# EAGLE board MG2639_Cellular_Shield_Panel-v11 (EAGLE 6.6.0), part 1 of 2
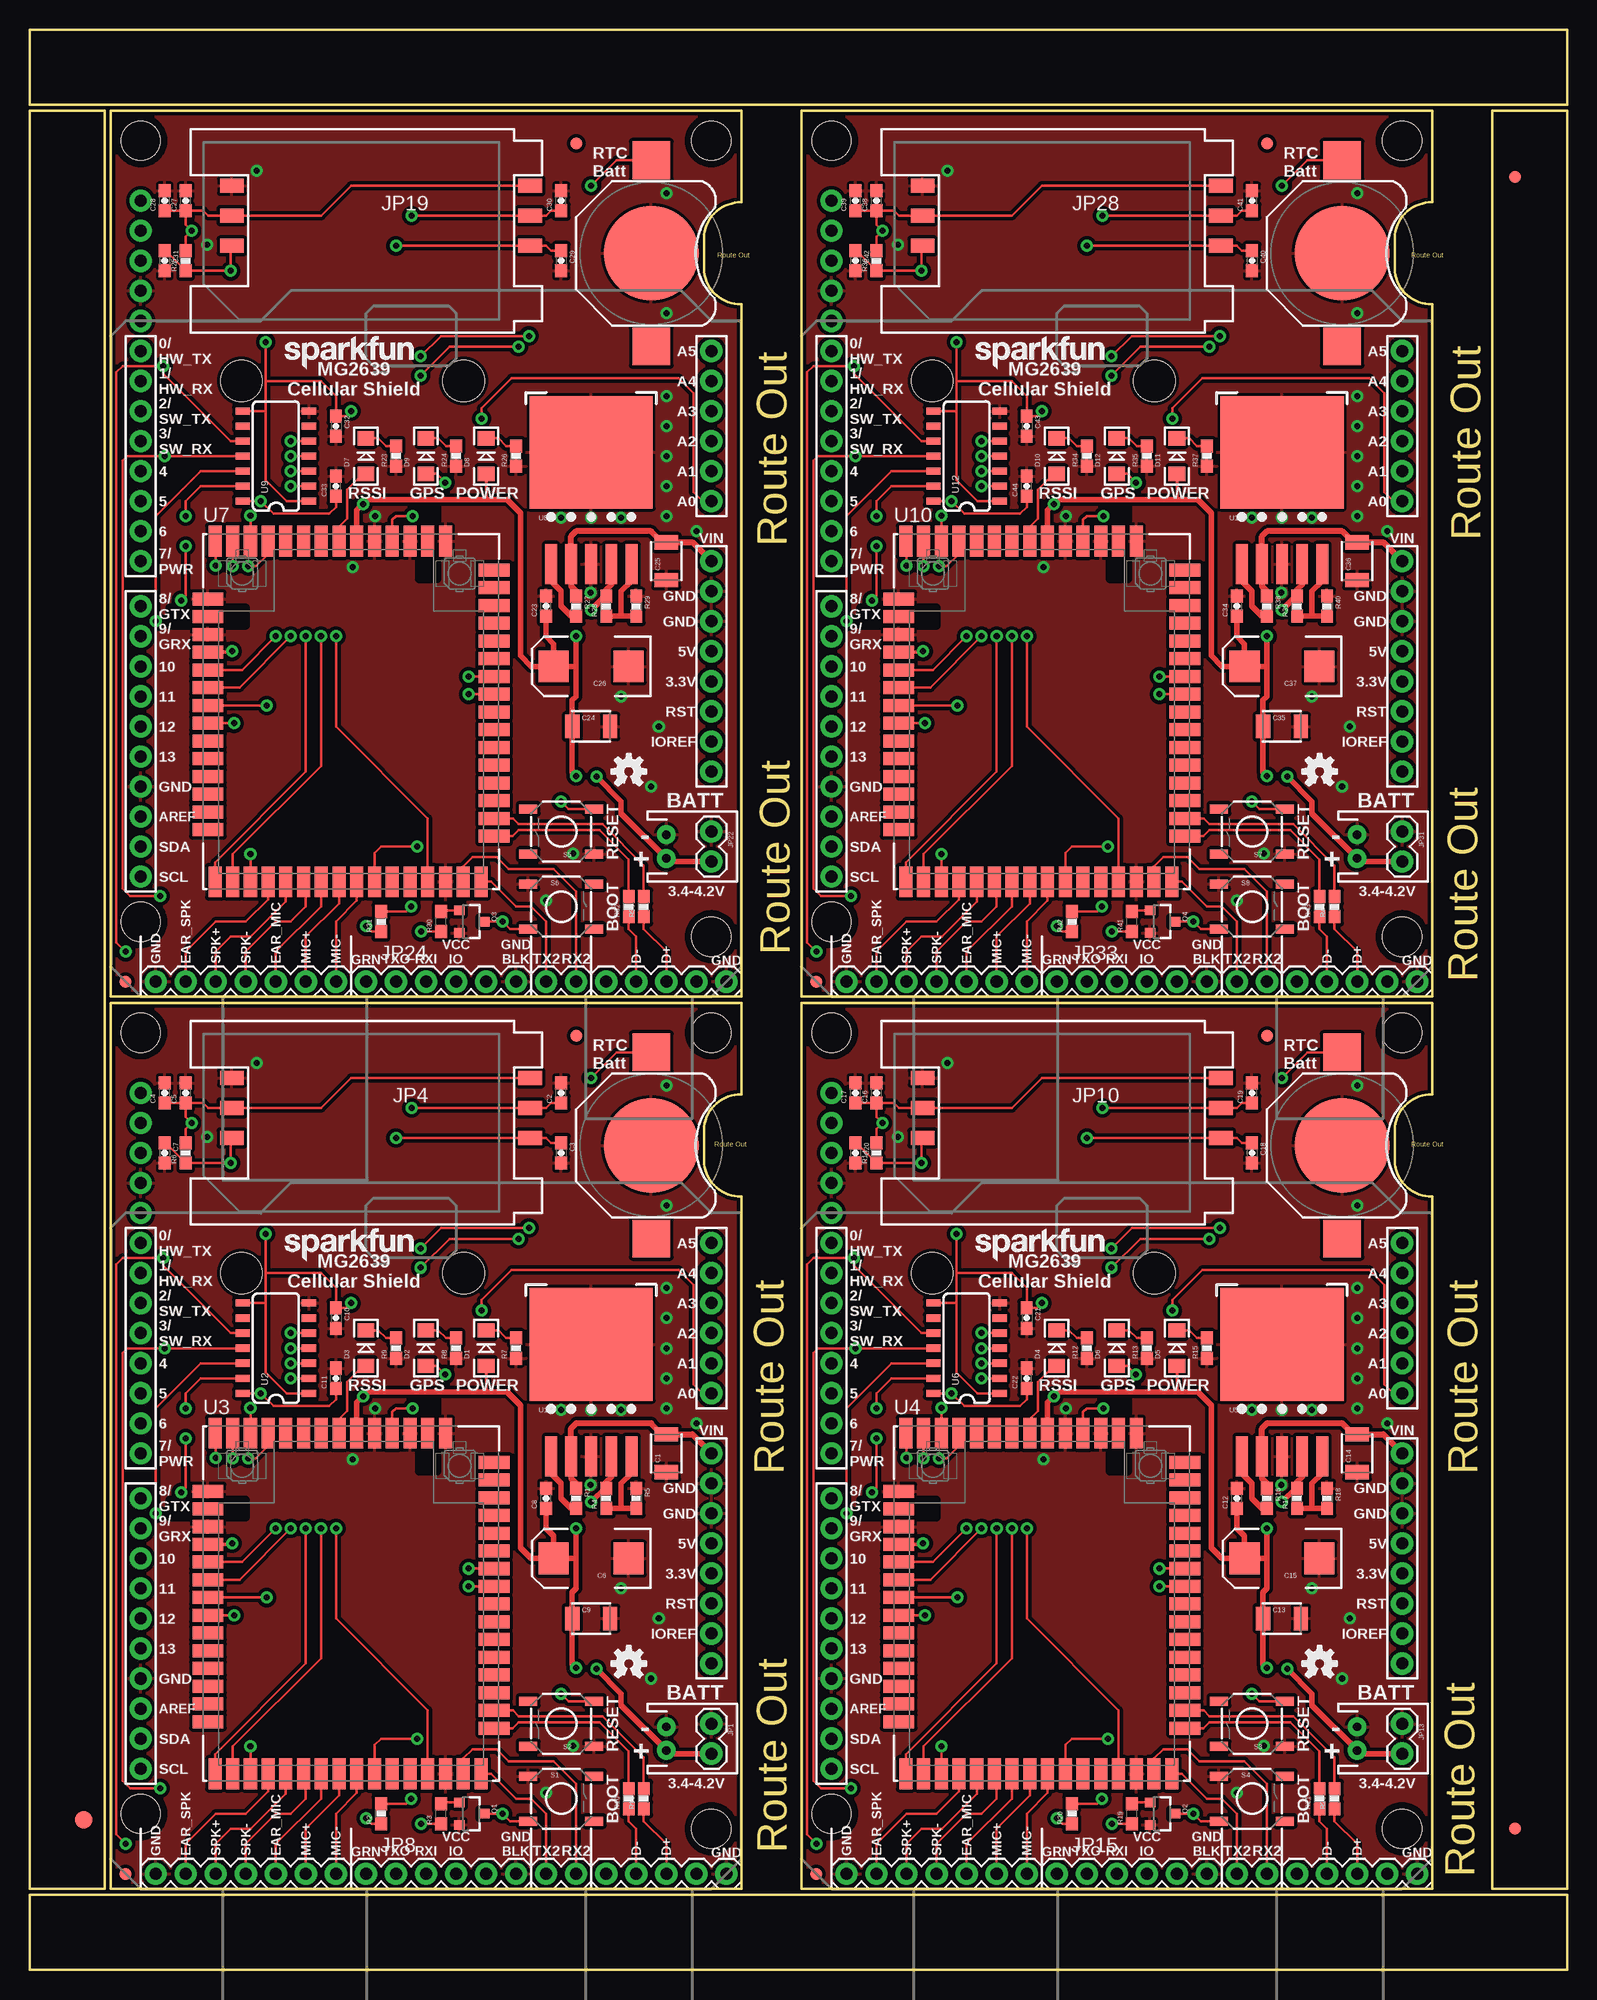
[diagram p0: board, top side]
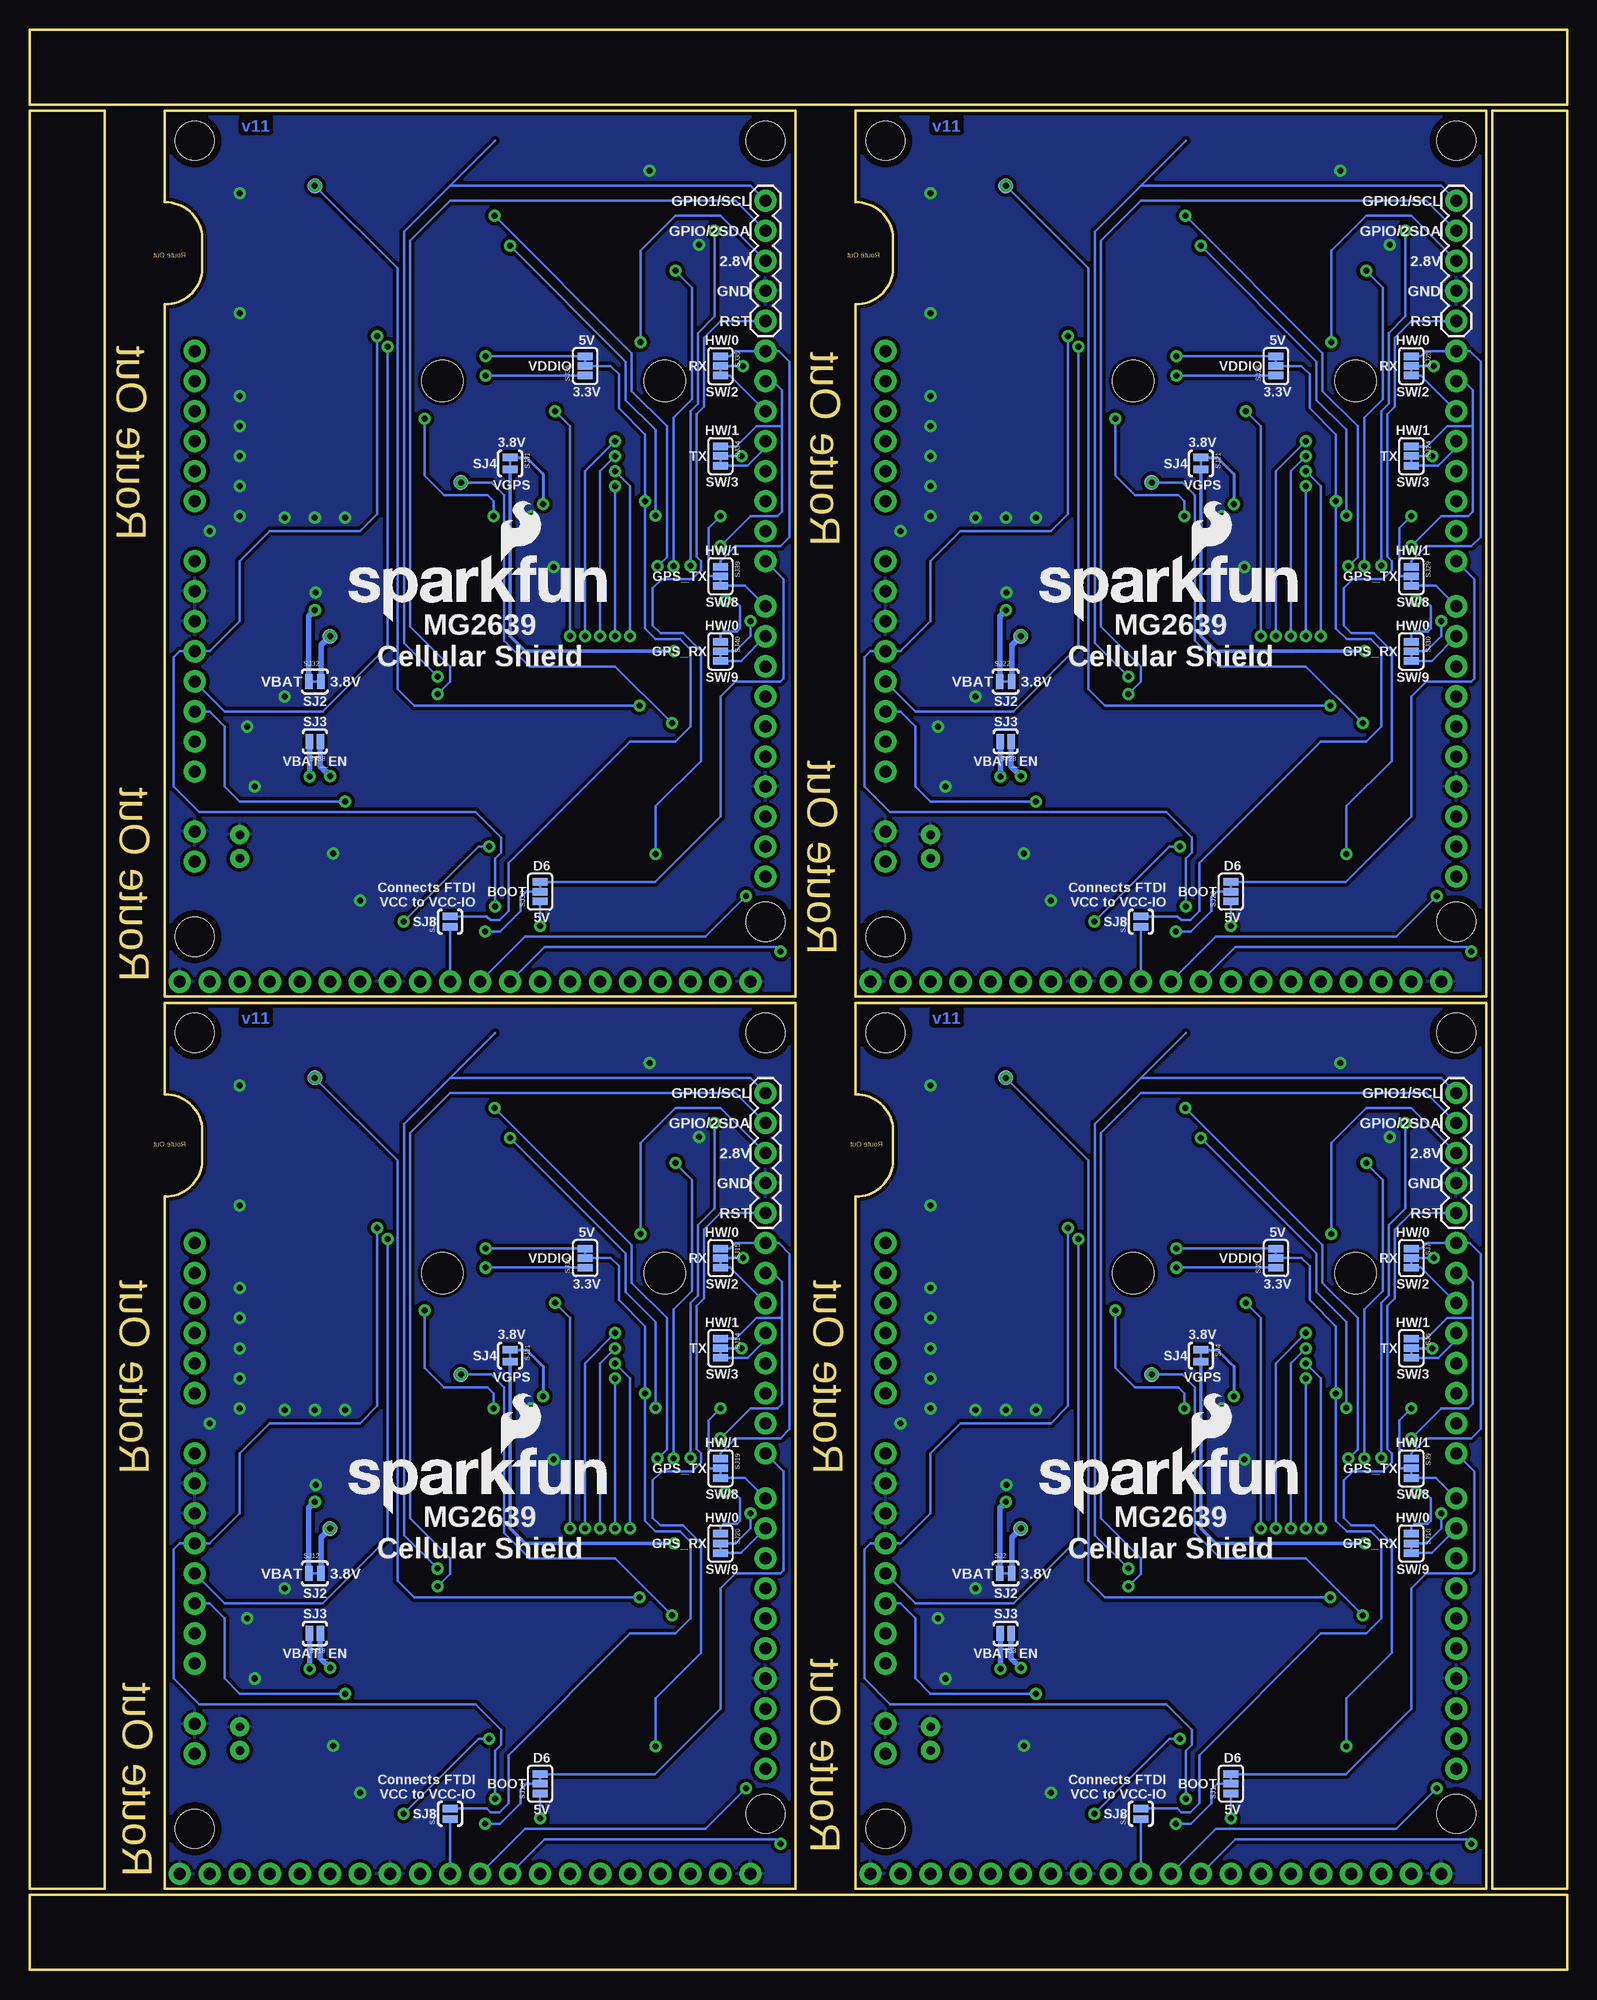
[diagram p1: board, bottom side, seen from below]

Size 130.05 x 164.08 mm. Coordinates in mm from the lower left corner, seen from the top.
Outline: 6.86,6.86 60.2,6.86 60.2,65.41 arc-90 57.02,68.45 57.02,70.99 arc-90 60.2,74.04 60.2,81.79 6.86,81.79 6.86,6.86
Outline: 65.28,6.86 118.62,6.86 118.62,65.41 arc-90 115.44,68.45 115.44,70.99 arc-90 118.62,74.04 118.62,81.79 65.28,81.79 65.28,6.86
Outline: 6.86,82.3 60.2,82.3 60.2,140.84 arc-90 57.02,143.89 57.02,146.43 arc-90 60.2,149.48 60.2,157.23 6.86,157.23 6.86,82.3
Outline: 65.28,82.3 118.62,82.3 118.62,140.84 arc-90 115.44,143.89 115.44,146.43 arc-90 118.62,149.48 118.62,157.23 65.28,157.23 65.28,82.3
Outline: 6.35,6.86 6.35,157.23 0,157.23 0,6.86 6.35,6.86
Outline: 0,0 130.05,0 130.05,6.35 0,6.35 0,0
Outline: 123.7,6.86 130.05,6.86 130.05,157.23 123.7,157.23 123.7,6.86
Outline: 130.05,164.08 0,164.08 0,157.73 130.05,157.73 130.05,164.08
Copper layers (1*16): Top 0.035mm / dielectric 1.5mm / Bottom 0.035mm
Design rules "SparkFun-2-layer *": minimum track width 7mil, minimum drill 15mil, track to track 7mil, track to pad 7mil, pad to pad 7mil, via to via 7mil, smd to smd 7mil, copper to edge 8mil, drill to drill 8mil, minimum pad ring 12mil, minimum via ring 10mil, stop-mask expansion 4mil, vias tented up to drill 20mil, thermal gap 10mil
Net classes: 0 default: width 0.203 mm; 1 3.8V: width 0.305 mm
Holes 3.5 mm at 36.7,58.93 17.91,58.93 95.12,58.93 76.33,58.93 36.7,134.37 17.91,134.37 95.12,134.37 76.33,134.37
tRestrict: area 16.5,38.3 to 18.3,39.8; area 11.9,38.3 to 13.7,39.8; area 33,42.2 to 34.5,44; area 33,46.8 to 34.5,48.6; area 74.9,38.3 to 76.7,39.8; area 70.3,38.3 to 72.1,39.8; area 91.4,42.2 to 92.9,44; area 91.4,46.8 to 92.9,48.6; area 16.5,113.7 to 18.3,115.2; area 11.9,113.7 to 13.7,115.2; area 33,117.6 to 34.5,119.4; area 33,122.2 to 34.5,124; 4 more areas

## Footprints (pad centres in the part's own frame; a part is rotated, then mirrored left to right if it is on the bottom)
BATTCON_12MM = smd 8 x 8: GND 0,0 | smd 3.175 x 3.175: PWR@1 -7.874,0; PWR@2 7.874,0
1210 = smd 1.2 x 2: 1 -1.6,0; 2 1.6,0
0603-CAP = smd 1.1 x 1: 1 -0.85,0; 2 0.85,0
EIA7343 = smd 2.55 x 2.7: A 3.17,0; C -3.17,0
LED-1206 = smd 1.2 x 1.4: A -1.5,0; C 1.5,0
FIDUCIAL-1.5X3 = smd 1.5 x 1.5: 1 0,0
FIDUCIAL-1X2 = smd 1 x 1: 1 0,0
JST-2-PTH = drill 0.7 pad 1.6: 1 -1,0; 2 1,0
1X02 = drill 1.016 pad 1.88: 1 0,0; 2 2.54,0
UNO_R3_SHIELD_NOLABELS = drill 1.016 pad 1.88: 3.3V 50.8,26.67; 5V 50.8,29.21; A0 50.8,41.91; A1 50.8,44.45; A2 50.8,46.99; A3 50.8,49.53; A4 50.8,52.07; A5 50.8,54.61; AREF 2.54,15.24; D2 2.54,49.53; D3 2.54,46.99; D4 2.54,44.45; D5 2.54,41.91; D6 2.54,39.37; D7 2.54,36.83; D8 2.54,33.02; D9 2.54,30.48; D10 2.54,27.94; D11 2.54,25.4; D12 2.54,22.86; D13 2.54,20.32; GND@0 50.8,31.75; GND@1 50.8,34.29; GND@2 2.54,17.78; IOREF 50.8,21.59; NC 50.8,19.05; RES 50.8,24.13; RX 2.54,54.61; SCL 2.54,10.16; SDA 2.54,12.7; TX 2.54,52.07; VIN 50.8,36.83
SIMHOLDER = smd 2 x 1.2: C1 -12.61,-3.81; C2 -12.61,-1.27; C3 -12.61,1.27; C5 12.61,-3.81; C6 12.61,-1.27; C7 12.61,1.27
1X07 = drill 1.016 pad 1.88: 1 0,0; 2 2.54,0; 3 5.08,0; 4 7.62,0; 5 10.16,0; 6 12.7,0; 7 15.24,0
1X05 = drill 1.016 pad 1.88: 1 0,0; 2 2.54,0; 3 5.08,0; 4 7.62,0; 5 10.16,0
FTDI_BASIC = drill 1.016 pad 1.88: CTS 10.16,0; DTR 0,0; GND 12.7,0; RXI 2.54,0; TXO 5.08,0; VCC 7.62,0
SOT23-3 = smd 0.8 x 0.9: 1 -0.95,-1; 2 0.95,-1; 3 0,1.1
0603-RES = smd 1.1 x 1: 1 -0.85,0; 2 0.85,0
0603 = smd 1.1 x 1: 1 -0.85,0; 2 0.85,0
TACTILE-SWITCH-SMD = smd 1.524 x 0.762: 1 -2.794,1.905; 2 2.794,1.905; 3 -2.794,-1.905; 4 2.794,-1.905
PAD-JUMPER-3-2OF3_NC_BY_TRACE_YES_SILK_FULL_BOX = smd 0.635 x 1.27: 1 -0.813,0; 2 0,0; 3 0.813,0
PAD-JUMPER-2-NC_BY_TRACE_YES_SILK = smd 0.635 x 1.27: 1 -0.508,0; 2 0.508,0
PAD-JUMPER-2-NO_YES_SILK = smd 0.635 x 1.27: 1 -0.45,0; 2 0.45,0
STAND-OFF = hole 3.302: 0,0
PAD.03X.05 = smd 1.27 x 1.27: P$1 0,0
Q5-DD_SPX29300 = smd 1 x 3.4: 1 -3.4,-7.875; 2 -1.7,-7.875; 3 0,-7.875; 4 1.7,-7.875; 5 3.4,-7.875 | smd 10.414 x 9.525: 6 0,1.595
SO14 = smd 0.6 x 1.2: 1 -3.81,-2.8; 2 -2.54,-2.8; 3 -1.27,-2.8; 4 0,-2.8; 5 1.27,-2.8; 6 2.54,-2.8; 7 3.81,-2.8; 8 3.81,2.8; 9 2.54,2.8; 10 1.27,2.8; 11 0,2.8; 12 -1.27,2.8; 13 -2.54,2.8; 14 -3.81,2.8
MG2639 = smd 1.1 x 2.6: 1 8,14.4; 2 6.5,14.4; 3 5,14.4; 4 3.5,14.4; 5 2,14.4; 6 0.5,14.4; 7 -1,14.4; 8 -2.5,14.4; 9 -4,14.4; 10 -5.5,14.4; 11 -7,14.4; 12 -8.5,14.4; 13 -10,14.4; 14 -11.5,14.4; 29 -11.5,-14.4; 30 -10,-14.4; 31 -8.5,-14.4; 32 -7,-14.4; 33 -5.5,-14.4; 34 -4,-14.4; 35 -2.5,-14.4; 36 -1,-14.4; 37 0.5,-14.4; 38 2,-14.4; 39 3.5,-14.4; 40 5,-14.4; 41 6.5,-14.4; 42 8,-14.4; 43 9.5,-14.4; 44 11,-14.4 | smd 2.6 x 1.1: 15 -12.1,9.5; 16 -12.1,8; 17 -12.1,6.5; 18 -12.1,5; 19 -12.1,3.5; 20 -12.1,2; 21 -12.1,0.5; 22 -12.1,-1; 23 -12.1,-2.5; 24 -12.1,-4; 25 -12.1,-5.5; 26 -12.1,-7; 27 -12.1,-8.5; 28 -12.1,-10; 45 12.1,-10.55; 46 12.1,-9.05; 47 12.1,-7.55; 48 12.1,-6.05; 49 12.1,-4.55; 50 12.1,-3.05; 51 12.1,-1.55; 52 12.1,-0.05; 53 12.1,1.45; 54 12.1,2.95; 55 12.1,4.45; 56 12.1,5.95; 57 12.1,7.45; 58 12.1,8.95; 59 12.1,10.45; 60 12.1,11.95

## Placement (x,y rotation side)
BAT1  12mm coincell  [BATTCON_12MM]  52.58,69.72 270 top
BAT2  12mm coincell  [BATTCON_12MM]  111,69.72 270 top
BAT3  12mm coincell  [BATTCON_12MM]  52.58,145.16 270 top
BAT4  12mm coincell  [BATTCON_12MM]  111,145.16 270 top
C1  10uF  [1210]  53.85,43.69 90 top
C2  33pF  [0603-CAP]  44.96,74.17 90 top
C3  33pF  [0603-CAP]  44.96,69.09 270 top
C4  1.0uF  [0603-CAP]  11.43,74.17 90 top
C5  0.1uF  [0603-CAP]  13.21,74.17 90 top
C6  100uF  [EIA7343]  47.5,34.8 180 top
C7  33pF  [0603-CAP]  11.43,69.09 270 top
C8  0.1uF  [0603-CAP]  43.69,39.88 90 top
C9  10uF  [1210]  47.5,29.72 0 top
C10  0.1uF  [0603-CAP]  25.91,55.12 270 top
C11  0.1uF  [0603-CAP]  25.91,50.04 90 top
C12  0.1uF  [0603-CAP]  102.11,39.88 90 top
C13  10uF  [1210]  105.92,29.72 0 top
C14  10uF  [1210]  112.27,43.69 90 top
C15  100uF  [EIA7343]  105.92,34.8 180 top
C16  0.1uF  [0603-CAP]  71.63,74.17 90 top
C17  1.0uF  [0603-CAP]  69.85,74.17 90 top
C18  33pF  [0603-CAP]  103.38,69.09 270 top
C19  33pF  [0603-CAP]  103.38,74.17 90 top
C20  33pF  [0603-CAP]  69.85,69.09 270 top
C21  0.1uF  [0603-CAP]  84.33,55.12 270 top
C22  0.1uF  [0603-CAP]  84.33,50.04 90 top
C23  0.1uF  [0603-CAP]  43.69,115.32 90 top
C24  10uF  [1210]  47.5,105.16 0 top
C25  10uF  [1210]  53.85,119.13 90 top
C26  100uF  [EIA7343]  47.5,110.24 180 top
C27  0.1uF  [0603-CAP]  13.21,149.61 90 top
C28  1.0uF  [0603-CAP]  11.43,149.61 90 top
C29  33pF  [0603-CAP]  44.96,144.53 270 top
C30  33pF  [0603-CAP]  44.96,149.61 90 top
C31  33pF  [0603-CAP]  11.43,144.53 270 top
C32  0.1uF  [0603-CAP]  25.91,130.56 270 top
C33  0.1uF  [0603-CAP]  25.91,125.48 90 top
C34  0.1uF  [0603-CAP]  102.11,115.32 90 top
C35  10uF  [1210]  105.92,105.16 0 top
C36  10uF  [1210]  112.27,119.13 90 top
C37  100uF  [EIA7343]  105.92,110.24 180 top
C38  0.1uF  [0603-CAP]  71.63,149.61 90 top
C39  1.0uF  [0603-CAP]  69.85,149.61 90 top
C40  33pF  [0603-CAP]  103.38,144.53 270 top
C41  33pF  [0603-CAP]  103.38,149.61 90 top
C42  33pF  [0603-CAP]  69.85,144.53 270 top
C43  0.1uF  [0603-CAP]  84.33,130.56 270 top
C44  0.1uF  [0603-CAP]  84.33,125.48 90 top
D1  RED  [LED-1206]  38.61,52.58 90 top
D2  YELLOW  [LED-1206]  33.53,52.58 90 top
D3  GREEN  [LED-1206]  28.45,52.58 90 top
D4  GREEN  [LED-1206]  86.87,52.58 90 top
D5  RED  [LED-1206]  97.03,52.58 90 top
D6  YELLOW  [LED-1206]  91.95,52.58 90 top
D7  GREEN  [LED-1206]  28.45,128.02 90 top
D8  RED  [LED-1206]  38.61,128.02 90 top
D9  YELLOW  [LED-1206]  33.53,128.02 90 top
D10  GREEN  [LED-1206]  86.87,128.02 90 top
D11  RED  [LED-1206]  97.03,128.02 90 top
D12  YELLOW  [LED-1206]  91.95,128.02 90 top
E$1  [FIDUCIAL-1.5X3]  4.57,12.7 0 top
E$4  [FIDUCIAL-1X2]  125.6,11.94 0 top
E$5  [FIDUCIAL-1X2]  125.6,151.64 180 top
FID1  FIDUCIAL1X2  [FIDUCIAL-1X2]  8.13,8.13 0 top
FID2  FIDUCIAL1X2  [FIDUCIAL-1X2]  46.23,78.99 0 top
FID3  FIDUCIAL1X2  [FIDUCIAL-1X2]  66.55,8.13 0 top
FID4  FIDUCIAL1X2  [FIDUCIAL-1X2]  104.65,78.99 0 top
FID5  FIDUCIAL1X2  [FIDUCIAL-1X2]  8.13,83.57 0 top
FID6  FIDUCIAL1X2  [FIDUCIAL-1X2]  46.23,154.43 0 top
FID7  FIDUCIAL1X2  [FIDUCIAL-1X2]  66.55,83.57 0 top
FID8  FIDUCIAL1X2  [FIDUCIAL-1X2]  104.65,154.43 0 top
JP1  LiPo  [JST-2-PTH]  53.85,19.56 270 top
JP2  M02PTH  [1X02]  57.66,20.83 270 top
JP3  ARDUINO_R3_SHIELD  [UNO_R3_SHIELD_NOLABELS]  6.86,6.86 0 top
JP4  SIMHOLDER  [SIMHOLDER]  29.72,71.63 180 top
JP5  AUDIO  [1X07]  25.91,8.13 180 top
JP6  MISC  [1X05]  9.4,74.17 270 bottom
JP7  UART2  [1X02]  46.23,8.13 180 top
JP8  FTDI_BASICPTH  [FTDI_BASIC]  28.45,8.13 0 top
JP9  USB  [1X05]  58.93,8.13 180 top
JP10  SIMHOLDER  [SIMHOLDER]  88.14,71.63 180 top
JP11  ARDUINO_R3_SHIELD  [UNO_R3_SHIELD_NOLABELS]  65.28,6.86 0 top
JP12  AUDIO  [1X07]  84.33,8.13 180 top
JP13  LiPo  [JST-2-PTH]  112.27,19.56 270 top
JP14  USB  [1X05]  117.35,8.13 180 top
JP15  FTDI_BASICPTH  [FTDI_BASIC]  86.87,8.13 0 top
JP16  M02PTH  [1X02]  116.08,20.83 270 top
JP17  UART2  [1X02]  104.65,8.13 180 top
JP18  MISC  [1X05]  67.82,74.17 270 bottom
JP19  SIMHOLDER  [SIMHOLDER]  29.72,147.07 180 top
JP20  ARDUINO_R3_SHIELD  [UNO_R3_SHIELD_NOLABELS]  6.86,82.3 0 top
JP21  AUDIO  [1X07]  25.91,83.57 180 top
JP22  LiPo  [JST-2-PTH]  53.85,95 270 top
JP23  USB  [1X05]  58.93,83.57 180 top
JP24  FTDI_BASICPTH  [FTDI_BASIC]  28.45,83.57 0 top
JP25  M02PTH  [1X02]  57.66,96.27 270 top
JP26  UART2  [1X02]  46.23,83.57 180 top
JP27  MISC  [1X05]  9.4,149.61 270 bottom
JP28  SIMHOLDER  [SIMHOLDER]  88.14,147.07 180 top
JP29  ARDUINO_R3_SHIELD  [UNO_R3_SHIELD_NOLABELS]  65.28,82.3 0 top
JP30  AUDIO  [1X07]  84.33,83.57 180 top
JP31  LiPo  [JST-2-PTH]  112.27,95 270 top
JP32  USB  [1X05]  117.35,83.57 180 top
JP33  FTDI_BASICPTH  [FTDI_BASIC]  86.87,83.57 0 top
JP34  M02PTH  [1X02]  116.08,96.27 270 top
JP35  UART2  [1X02]  104.65,83.57 180 top
JP36  MISC  [1X05]  67.82,149.61 270 bottom
LOGO1  SFE_LOGO_NAME.1_INCH  [SFE_LOGO_NAME_.1]  21.08,59.41 0 top
LOGO2  SFE_LOGO_NAME_FLAME.2_INCH  [SFE_LOGO_NAME_FLAME_.2]  45.34,38.48 0 bottom
LOGO3  OSHW-LOGOS  [OSHW-LOGO-S]  50.67,25.91 0 top
LOGO4  OSHW-LOGOS  [OSHW-LOGO-S]  109.09,25.91 0 top
LOGO5  SFE_LOGO_NAME_FLAME.2_INCH  [SFE_LOGO_NAME_FLAME_.2]  103.76,38.48 0 bottom
LOGO6  SFE_LOGO_NAME.1_INCH  [SFE_LOGO_NAME_.1]  79.5,59.41 0 top
LOGO7  OSHW-LOGOS  [OSHW-LOGO-S]  50.67,101.35 0 top
LOGO8  SFE_LOGO_NAME_FLAME.2_INCH  [SFE_LOGO_NAME_FLAME_.2]  45.34,113.92 0 bottom
LOGO9  SFE_LOGO_NAME.1_INCH  [SFE_LOGO_NAME_.1]  21.08,134.85 0 top
LOGO10  OSHW-LOGOS  [OSHW-LOGO-S]  109.09,101.35 0 top
LOGO11  SFE_LOGO_NAME_FLAME.2_INCH  [SFE_LOGO_NAME_FLAME_.2]  103.76,113.92 0 bottom
LOGO12  SFE_LOGO_NAME.1_INCH  [SFE_LOGO_NAME_.1]  79.5,134.85 0 top
Q1  MMBT2222A  [SOT23-3]  37.34,13.21 270 top
Q2  MMBT2222A  [SOT23-3]  95.76,13.21 270 top
Q3  MMBT2222A  [SOT23-3]  37.34,88.65 270 top
Q4  MMBT2222A  [SOT23-3]  95.76,88.65 270 top
R1  10K  [0603-RES]  46.23,39.88 270 top
R2  1K  [0603-RES]  29.72,13.21 90 top
R3  4.7K  [0603]  34.8,13.21 90 top
R4  2.2k  [0603-RES]  48.77,39.88 90 top
R5  1K  [0603-RES]  51.31,39.88 270 top
R6  10K  [0603-RES]  13.21,69.09 90 top
R7  1K  [0603-RES]  41.15,52.58 90 top
R8  1K  [0603-RES]  36.07,52.58 90 top
R9  1K  [0603-RES]  30.99,52.58 90 top
R10  22  [0603-RES]  50.67,14.48 90 top
R11  22  [0603-RES]  51.94,14.48 90 top
R12  1K  [0603-RES]  89.41,52.58 90 top
R13  1K  [0603-RES]  94.49,52.58 90 top
R14  10K  [0603-RES]  71.63,69.09 90 top
R15  1K  [0603-RES]  99.57,52.58 90 top
R16  10K  [0603-RES]  104.65,39.88 270 top
R17  2.2k  [0603-RES]  107.19,39.88 90 top
R18  1K  [0603-RES]  109.73,39.88 270 top
R19  4.7K  [0603]  93.22,13.21 90 top
R20  1K  [0603-RES]  88.14,13.21 90 top
R21  22  [0603-RES]  109.09,14.48 90 top
R22  22  [0603-RES]  110.36,14.48 90 top
R23  1K  [0603-RES]  30.99,128.02 90 top
R24  1K  [0603-RES]  36.07,128.02 90 top
R25  10K  [0603-RES]  13.21,144.53 90 top
R26  1K  [0603-RES]  41.15,128.02 90 top
R27  10K  [0603-RES]  46.23,115.32 270 top
R28  2.2k  [0603-RES]  48.77,115.32 90 top
R29  1K  [0603-RES]  51.31,115.32 270 top
R30  4.7K  [0603]  34.8,88.65 90 top
R31  1K  [0603-RES]  29.72,88.65 90 top
R32  22  [0603-RES]  50.67,89.92 90 top
R33  22  [0603-RES]  51.94,89.92 90 top
R34  1K  [0603-RES]  89.41,128.02 90 top
R35  1K  [0603-RES]  94.49,128.02 90 top
R36  10K  [0603-RES]  71.63,144.53 90 top
R37  1K  [0603-RES]  99.57,128.02 90 top
R38  10K  [0603-RES]  104.65,115.32 270 top
R39  2.2k  [0603-RES]  107.19,115.32 90 top
R40  1K  [0603-RES]  109.73,115.32 270 top
R41  4.7K  [0603]  93.22,88.65 90 top
R42  1K  [0603-RES]  88.14,88.65 90 top
R43  22  [0603-RES]  109.09,89.92 90 top
R44  22  [0603-RES]  110.36,89.92 90 top
S1  BOOT  [TACTILE-SWITCH-SMD]  44.96,14.48 0 top
S2  RESET  [TACTILE-SWITCH-SMD]  44.96,20.83 180 top
S3  RESET  [TACTILE-SWITCH-SMD]  103.38,20.83 180 top
S4  BOOT  [TACTILE-SWITCH-SMD]  103.38,14.48 0 top
S5  RESET  [TACTILE-SWITCH-SMD]  44.96,96.27 180 top
S6  BOOT  [TACTILE-SWITCH-SMD]  44.96,89.92 0 top
S7  RESET  [TACTILE-SWITCH-SMD]  103.38,96.27 180 top
S8  BOOT  [TACTILE-SWITCH-SMD]  103.38,89.92 0 top
SJ1  BOOT  [PAD-JUMPER-3-2OF3_NC_BY_TRACE_YES_SILK_FULL_BOX]  28.45,15.75 90 bottom
SJ2  VBAT1  [PAD-JUMPER-2-NC_BY_TRACE_YES_SILK]  47.5,33.53 0 bottom
SJ3  VBAT_EN  [PAD-JUMPER-2-NO_YES_SILK]  47.5,28.45 180 bottom
SJ4  [PAD-JUMPER-2-NC_BY_TRACE_YES_SILK]  30.99,51.94 270 bottom
SJ5  [PAD-JUMPER-3-2OF3_NC_BY_TRACE_YES_SILK_FULL_BOX]  24.64,60.2 90 bottom
SJ6  [PAD-JUMPER-3-2OF3_NC_BY_TRACE_YES_SILK_FULL_BOX]  13.21,52.58 270 bottom
SJ7  [PAD-JUMPER-3-2OF3_NC_BY_TRACE_YES_SILK_FULL_BOX]  13.21,60.2 270 bottom
SJ8  FTDI_VCCIO  [PAD-JUMPER-2-NO_YES_SILK]  36.07,13.21 90 bottom
SJ9  [PAD-JUMPER-3-2OF3_NC_BY_TRACE_YES_SILK_FULL_BOX]  13.21,42.42 270 bottom
SJ10  [PAD-JUMPER-3-2OF3_NC_BY_TRACE_YES_SILK_FULL_BOX]  13.21,36.07 270 bottom
SJ11  [PAD-JUMPER-2-NC_BY_TRACE_YES_SILK]  89.41,51.94 270 bottom
SJ12  VBAT1  [PAD-JUMPER-2-NC_BY_TRACE_YES_SILK]  105.92,33.53 0 bottom
SJ13  BOOT  [PAD-JUMPER-3-2OF3_NC_BY_TRACE_YES_SILK_FULL_BOX]  86.87,15.75 90 bottom
SJ14  [PAD-JUMPER-3-2OF3_NC_BY_TRACE_YES_SILK_FULL_BOX]  71.63,52.58 270 bottom
SJ15  [PAD-JUMPER-3-2OF3_NC_BY_TRACE_YES_SILK_FULL_BOX]  71.63,60.2 270 bottom
SJ16  [PAD-JUMPER-3-2OF3_NC_BY_TRACE_YES_SILK_FULL_BOX]  83.06,60.2 90 bottom
SJ17  FTDI_VCCIO  [PAD-JUMPER-2-NO_YES_SILK]  94.49,13.21 90 bottom
SJ18  VBAT_EN  [PAD-JUMPER-2-NO_YES_SILK]  105.92,28.45 180 bottom
SJ19  [PAD-JUMPER-3-2OF3_NC_BY_TRACE_YES_SILK_FULL_BOX]  71.63,42.42 270 bottom
SJ20  [PAD-JUMPER-3-2OF3_NC_BY_TRACE_YES_SILK_FULL_BOX]  71.63,36.07 270 bottom
SJ21  [PAD-JUMPER-2-NC_BY_TRACE_YES_SILK]  30.99,127.38 270 bottom
SJ22  VBAT1  [PAD-JUMPER-2-NC_BY_TRACE_YES_SILK]  47.5,108.97 0 bottom
SJ23  BOOT  [PAD-JUMPER-3-2OF3_NC_BY_TRACE_YES_SILK_FULL_BOX]  28.45,91.19 90 bottom
SJ24  [PAD-JUMPER-3-2OF3_NC_BY_TRACE_YES_SILK_FULL_BOX]  13.21,128.02 270 bottom
SJ25  [PAD-JUMPER-3-2OF3_NC_BY_TRACE_YES_SILK_FULL_BOX]  13.21,135.64 270 bottom
SJ26  [PAD-JUMPER-3-2OF3_NC_BY_TRACE_YES_SILK_FULL_BOX]  24.64,135.64 90 bottom
SJ27  FTDI_VCCIO  [PAD-JUMPER-2-NO_YES_SILK]  36.07,88.65 90 bottom
SJ28  VBAT_EN  [PAD-JUMPER-2-NO_YES_SILK]  47.5,103.89 180 bottom
SJ29  [PAD-JUMPER-3-2OF3_NC_BY_TRACE_YES_SILK_FULL_BOX]  13.21,117.86 270 bottom
SJ30  [PAD-JUMPER-3-2OF3_NC_BY_TRACE_YES_SILK_FULL_BOX]  13.21,111.51 270 bottom
SJ31  [PAD-JUMPER-2-NC_BY_TRACE_YES_SILK]  89.41,127.38 270 bottom
SJ32  VBAT1  [PAD-JUMPER-2-NC_BY_TRACE_YES_SILK]  105.92,108.97 0 bottom
SJ33  BOOT  [PAD-JUMPER-3-2OF3_NC_BY_TRACE_YES_SILK_FULL_BOX]  86.87,91.19 90 bottom
SJ34  [PAD-JUMPER-3-2OF3_NC_BY_TRACE_YES_SILK_FULL_BOX]  71.63,128.02 270 bottom
SJ35  [PAD-JUMPER-3-2OF3_NC_BY_TRACE_YES_SILK_FULL_BOX]  71.63,135.64 270 bottom
SJ36  [PAD-JUMPER-3-2OF3_NC_BY_TRACE_YES_SILK_FULL_BOX]  83.06,135.64 90 bottom
SJ37  FTDI_VCCIO  [PAD-JUMPER-2-NO_YES_SILK]  94.49,88.65 90 bottom
SJ38  VBAT_EN  [PAD-JUMPER-2-NO_YES_SILK]  105.92,103.89 180 bottom
SJ39  [PAD-JUMPER-3-2OF3_NC_BY_TRACE_YES_SILK_FULL_BOX]  71.63,117.86 270 bottom
SJ40  [PAD-JUMPER-3-2OF3_NC_BY_TRACE_YES_SILK_FULL_BOX]  71.63,111.51 270 bottom
STANDOFF1  STAND-OFF  [STAND-OFF]  57.66,79.25 90 top
STANDOFF2  STAND-OFF  [STAND-OFF]  9.4,79.25 90 top
STANDOFF3  STAND-OFF  [STAND-OFF]  9.4,13.21 0 top
STANDOFF4  STAND-OFF  [STAND-OFF]  57.66,11.94 0 top
STANDOFF5  STAND-OFF  [STAND-OFF]  116.08,11.94 0 top
STANDOFF6  STAND-OFF  [STAND-OFF]  67.82,13.21 0 top
STANDOFF7  STAND-OFF  [STAND-OFF]  67.82,79.25 90 top
STANDOFF8  STAND-OFF  [STAND-OFF]  116.08,79.25 90 top
STANDOFF9  STAND-OFF  [STAND-OFF]  57.66,87.38 0 top
STANDOFF10  STAND-OFF  [STAND-OFF]  9.4,88.65 0 top
STANDOFF11  STAND-OFF  [STAND-OFF]  9.4,154.69 90 top
STANDOFF12  STAND-OFF  [STAND-OFF]  57.66,154.69 90 top
STANDOFF13  STAND-OFF  [STAND-OFF]  116.08,87.38 0 top
STANDOFF14  STAND-OFF  [STAND-OFF]  67.82,88.65 0 top
STANDOFF15  STAND-OFF  [STAND-OFF]  67.82,154.69 90 top
STANDOFF16  STAND-OFF  [STAND-OFF]  116.08,154.69 90 top
TP1  [PAD.03X.05]  35.15,50.34 0 bottom
TP2  [PAD.03X.05]  47.5,75.44 0 bottom
TP3  [PAD.03X.05]  46.23,37.34 0 bottom
TP4  [PAD.03X.05]  93.57,50.34 0 bottom
TP5  [PAD.03X.05]  105.92,75.44 0 bottom
TP6  [PAD.03X.05]  104.65,37.34 0 bottom
TP7  [PAD.03X.05]  35.15,125.78 0 bottom
TP8  [PAD.03X.05]  47.5,150.88 0 bottom
TP9  [PAD.03X.05]  46.23,112.78 0 bottom
TP10  [PAD.03X.05]  93.57,125.78 0 bottom
TP11  [PAD.03X.05]  105.92,150.88 0 bottom
TP12  [PAD.03X.05]  104.65,112.78 0 bottom
U1  SPX29302  [Q5-DD_SPX29300]  47.5,51.31 0 top
U2  TXB0104  [SO14]  20.83,52.58 90 top
U3  MG2639V3  [MG2639]  27.18,30.99 0 top
U4  MG2639V3  [MG2639]  85.6,30.99 0 top
U5  SPX29302  [Q5-DD_SPX29300]  105.92,51.31 0 top
U6  TXB0104  [SO14]  79.25,52.58 90 top
U7  MG2639V3  [MG2639]  27.18,106.43 0 top
U8  SPX29302  [Q5-DD_SPX29300]  47.5,126.75 0 top
U9  TXB0104  [SO14]  20.83,128.02 90 top
U10  MG2639V3  [MG2639]  85.6,106.43 0 top
U11  SPX29302  [Q5-DD_SPX29300]  105.92,126.75 0 top
U12  TXB0104  [SO14]  79.25,128.02 90 top

## Library data of the parts
BAT1-BAT4 = SparkFun-Electromechanical; PROD_ID: BATT-08044
C1 C9 C13 C14 C24 C25 C35 C36 = SparkFun-Capacitors; PROD_ID: CAP-09824
C2 C3 C7 C18-C20 C29-C31 C40-C42 = SparkFun-Capacitors; PROD_ID: CAP-10142
C4 C17 C28 C39 = SparkFun-Capacitors; PROD_ID: CAP-00868
C5 C8 C10-C12 C16 C21-C23 C27 C32-C34 C38 C43 C44 = SparkFun-Capacitors; PROD_ID: CAP-00810
C6 C15 C26 C37 = SparkFun-Capacitors; PROD_ID: CAP-07890
D1 D5 D8 D11 = SparkFun-LED; PROD_ID: DIO-00809
D2 D6 D9 D12 = SparkFun-LED; PROD_ID: DIO-00820
D3 D4 D7 D10 = SparkFun-LED; PROD_ID: DIO-00862
E$1 = SparkFun-Retired
E$4 E$5 FID1-FID8 LOGO1-LOGO12 = SparkFun-Aesthetics
JP1 JP13 JP22 JP31 = SparkFun-Connectors; PROD_ID: CONN-09863; SKU: PRT-09914
JP2 JP5-JP9 JP12 JP14-JP18 JP21 JP23-JP27 JP30 JP32-JP36 = SparkFun-Connectors
JP3 JP11 JP20 JP29 = SparkFun-Boards
JP4 JP10 JP19 JP28 = SparkFun-Connectors; PROD_ID: CONN-08536
Q1-Q4 = SparkFun-DiscreteSemi; PROD_ID: TRANS-08049
R1 R6 R14 R16 R25 R27 R36 R38 = SparkFun-Resistors; PROD_ID: RES-00824
R2 R5 R7-R9 R12 R13 R15 R18 R20 R23 R24 R26 R29 R31 R34 R35 R37 R40 R42 = SparkFun-Resistors; PROD_ID: RES-07856
R3 R19 R30 R41 = SparkFun-Resistors; PROD_ID: RES-07857
R4 R17 R28 R39 = SparkFun-Resistors; PROD_ID: RES-08272
R10 R11 R21 R22 R32 R33 R43 R44 = SparkFun-Resistors; PROD_ID: RES-08698
S1-S8 = SparkFun-Electromechanical; PROD_ID: SWCH-08247
SJ1-SJ40 TP1-TP12 = SparkFun-Passives
STANDOFF1-STANDOFF16 = SparkFun-Electromechanical
U1 U5 U8 U11 = SparkFun-PowerIC; PROD_ID: VREG-08337
U2 U6 U9 U12 = SparkFun-DigitalIC; PROD_ID: IC-11329
U3 U4 U7 U10 = MG2639; PROD_ID: GPS-12331

## Nets
3.3V: JP3.3.3V SJ5.1
3.3V1: JP11.3.3V SJ16.1
3.3V2: JP20.3.3V SJ26.1
3.3V3: JP29.3.3V SJ36.1
3.8V: C6.A C8.1 C9.1 D1.A SJ2.2 SJ3.1 SJ4.1 TP3.P$1 U3.6
3.8V1: C12.1 C13.1 C15.A D5.A SJ11.1 SJ12.2 SJ18.1 TP6.P$1 U4.6
3.8V2: C23.1 C24.1 C26.A D8.A SJ21.1 SJ22.2 SJ28.1 TP9.P$1 U7.6
3.8V3: C34.1 C35.1 C37.A D11.A SJ31.1 SJ32.2 SJ38.1 TP12.P$1 U10.6
5V: JP3.5V R2.2 SJ5.3
5V1: JP11.5V R20.2 SJ16.3
5V2: JP20.5V R31.2 SJ26.3
5V3: JP29.5V R42.2 SJ36.3
!PWRKEY: Q1.3 S1.3 U3.38
!PWRKEY1: Q2.3 S4.3 U4.38
!PWRKEY2: Q3.3 S6.3 U7.38
!PWRKEY3: Q4.3 S8.3 U10.38
!SYSRST: JP6.5 U3.31
!SYSRST1: JP18.5 U4.31
!SYSRST2: JP27.5 U7.31
!SYSRST3: JP36.5 U10.31
ADCIN: U3.28
ADCIN1: U4.28
ADCIN2: U7.28
ADCIN3: U10.28
ADJUST: R4.1 R5.2 U1.5
ADJUST1: R17.1 R18.2 U5.5
ADJUST2: R28.1 R29.2 U8.5
ADJUST3: R39.1 R40.2 U11.5
EAR_L: JP5.6 U3.32
EAR_L1: JP12.6 U4.32
EAR_L2: JP21.6 U7.32
EAR_L3: JP30.6 U10.32
GND: BAT1.GND C1.1 C2.2 C3.2 C4.2 C5.2 C6.C C7.2 C8.2 C9.2 C10.2 C11.2 JP1.1 JP2.1 JP3.GND@0 JP3.GND@1 JP3.GND@2 JP4.C5 JP5.7 JP6.4 JP8.GND JP9.1 Q1.2 R5.1 R7.1 R8.1 R9.1 S1.1 S2.1 U1.3 U1.6 U2.7 U3.1 U3.3 U3.5 U3.15 U3.17 U3.42
GND1: BAT2.GND C12.2 C13.2 C14.1 C15.C C16.2 C17.2 C18.2 C19.2 C20.2 C21.2 C22.2 JP10.C5 JP11.GND@0 JP11.GND@1 JP11.GND@2 JP12.7 JP13.1 JP14.1 JP15.GND JP16.1 JP18.4 Q2.2 R12.1 R13.1 R15.1 R18.1 S3.1 S4.1 U4.1 U4.3 U4.5 U4.15 U4.17 U4.42 U5.3 U5.6 U6.7
GND2: BAT3.GND C23.2 C24.2 C25.1 C26.C C27.2 C28.2 C29.2 C30.2 C31.2 C32.2 C33.2 JP19.C5 JP20.GND@0 JP20.GND@1 JP20.GND@2 JP21.7 JP22.1 JP23.1 JP24.GND JP25.1 JP27.4 Q3.2 R23.1 R24.1 R26.1 R29.1 S5.1 S6.1 U7.1 U7.3 U7.5 U7.15 U7.17 U7.42 U8.3 U8.6 U9.7
GND3: BAT4.GND C34.2 C35.2 C36.1 C37.C C38.2 C39.2 C40.2 C41.2 C42.2 C43.2 C44.2 JP28.C5 JP29.GND@0 JP29.GND@1 JP29.GND@2 JP30.7 JP31.1 JP32.1 JP33.GND JP34.1 JP36.4 Q4.2 R34.1 R35.1 R37.1 R40.1 S7.1 S8.1 U10.1 U10.3 U10.5 U10.15 U10.17 U10.42 U11.3 U11.6 U12.7
GPIO1/SCL: JP6.1 U3.54
GPIO1/SCL1: JP18.1 U4.54
GPIO1/SCL2: JP27.1 U7.54
GPIO1/SCL3: JP36.1 U10.54
GPIO2/SDA: JP6.2 U3.53
GPIO2/SDA1: JP18.2 U4.53
GPIO2/SDA2: JP27.2 U7.53
GPIO2/SDA3: JP36.2 U10.53
GPS_FIX: D2.A TP1.P$1 U3.22
GPS_FIX1: D6.A TP4.P$1 U4.22
GPS_FIX2: D9.A TP7.P$1 U7.22
GPS_FIX3: D12.A TP10.P$1 U10.22
GPS_RTC: BAT1.PWR@1 TP2.P$1 U3.21
GPS_RTC1: BAT2.PWR@1 TP5.P$1 U4.21
GPS_RTC2: BAT3.PWR@1 TP8.P$1 U7.21
GPS_RTC3: BAT4.PWR@1 TP11.P$1 U10.21
GRX-2.8V: U2.3 U3.19
GRX-2.8V1: U4.19 U6.3
GRX-2.8V2: U7.19 U9.3
GRX-2.8V3: U10.19 U12.3
GRX-HV: SJ10.2 U2.12
GRX-HV1: SJ20.2 U6.12
GRX-HV2: SJ30.2 U9.12
GRX-HV3: SJ40.2 U12.12
GRX-SOFT: JP3.D9 SJ10.3
GRX-SOFT1: JP11.D9 SJ20.3
GRX-SOFT2: JP20.D9 SJ30.3
GRX-SOFT3: JP29.D9 SJ40.3
GTX-2.8V: U2.2 U3.20
GTX-2.8V1: U4.20 U6.2
GTX-2.8V2: U7.20 U9.2
GTX-2.8V3: U10.20 U12.2
GTX-HV: SJ9.2 U2.13
GTX-HV1: SJ19.2 U6.13
GTX-HV2: SJ29.2 U9.13
GTX-HV3: SJ39.2 U12.13
GTX-SOFT: JP3.D8 SJ9.3
GTX-SOFT1: JP11.D8 SJ19.3
GTX-SOFT2: JP20.D8 SJ29.3
GTX-SOFT3: JP29.D8 SJ39.3
MIC_N0: JP5.1 U3.37
MIC_N1: JP12.1 U4.37
MIC_N2: JP21.1 U7.37
MIC_N3: JP30.1 U10.37
MIC_P0: JP5.2 U3.36
MIC_P1: JP5.3 U3.35
MIC_P2: JP12.3 U4.35
MIC_P3: JP12.2 U4.36
MIC_P4: JP21.3 U7.35
MIC_P5: JP21.2 U7.36
MIC_P6: JP30.3 U10.35
MIC_P7: JP30.2 U10.36
N$1: R1.2 U1.1
N$2: JP9.4 R10.1
N$3: Q1.1 R3.2
N$4: R4.2 SJ2.1 U1.4
N$5: R3.1 SJ1.2
N$6: R2.1 SJ1.1
N$7: D3.A U3.7
N$8: D3.C R9.2
N$9: D2.C R8.2
N$10: JP9.3 R11.1
N$11: JP8.VCC SJ8.1
N$12: JP1.2 JP2.2 SJ3.2
N$13: D5.C R15.2
N$14: R16.2 U5.1
N$15: Q2.1 R19.2
N$16: R19.1 SJ13.2
N$17: D1.C R7.2
N$18: D4.A U4.7
N$19: D4.C R12.2
N$20: D6.C R13.2
N$21: R17.2 SJ12.1 U5.4
N$22: R20.1 SJ13.1
N$23: JP14.4 R21.1
N$24: JP14.3 R22.1
N$25: JP15.VCC SJ17.1
N$26: JP13.2 JP16.2 SJ18.2
N$27: D8.C R26.2
N$28: R27.2 U8.1
N$29: Q3.1 R30.2
N$30: R30.1 SJ23.2
N$31: D7.A U7.7
N$32: D7.C R23.2
N$33: D9.C R24.2
N$34: R28.2 SJ22.1 U8.4
N$35: R31.1 SJ23.1
N$36: JP23.4 R32.1
N$37: JP23.3 R33.1
N$38: JP24.VCC SJ27.1
N$39: JP22.2 JP25.2 SJ28.2
N$40: D11.C R37.2
N$41: R38.2 U11.1
N$42: Q4.1 R41.2
N$43: R41.1 SJ33.2
N$44: D10.A U10.7
N$45: D10.C R34.2
N$46: D12.C R35.2
N$47: R39.2 SJ32.1 U11.4
N$48: R42.1 SJ33.1
N$49: JP32.4 R43.1
N$50: JP32.3 R44.1
N$51: JP33.VCC SJ37.1
N$52: JP31.2 JP34.2 SJ38.2
ON/OFF: JP3.D7 SJ1.3
ON/OFF1: JP11.D7 SJ13.3
ON/OFF2: JP20.D7 SJ23.3
ON/OFF3: JP29.D7 SJ33.3
RECN: JP5.4 U3.34
RECN1: JP12.4 U4.34
RECN2: JP21.4 U7.34
RECN3: JP30.4 U10.34
RECP: JP5.5 U3.33
RECP1: JP12.5 U4.33
RECP2: JP21.5 U7.33
RECP3: JP30.5 U10.33
RESET: JP3.RES S2.3
RESET1: JP11.RES S3.3
RESET2: JP20.RES S5.3
RESET3: JP29.RES S7.3
RING: JP3.A0 U3.4
RING1: JP11.A0 U4.4
RING2: JP20.A0 U7.4
RING3: JP29.A0 U10.4
RX2-2.8V: JP7.1 U3.43
RX2-2.8V1: JP17.1 U4.43
RX2-2.8V2: JP26.1 U7.43
RX2-2.8V3: JP35.1 U10.43
RX-2.8V: U2.4 U3.29
RX-2.8V1: U4.29 U6.4
RX-2.8V2: U7.29 U9.4
RX-2.8V3: U10.29 U12.4
RX-HV: JP8.TXO SJ6.2 U2.11
RX-HV1: JP15.TXO SJ14.2 U6.11
RX-HV2: JP24.TXO SJ24.2 U9.11
RX-HV3: JP33.TXO SJ34.2 U12.11
RX-SOFT: JP3.D3 SJ6.3
RX-SOFT1: JP11.D3 SJ14.3
RX-SOFT2: JP20.D3 SJ24.3
RX-SOFT3: JP29.D3 SJ34.3
RXI: JP3.RX SJ7.1 SJ9.1
RXI1: JP11.RX SJ15.1 SJ19.1
RXI2: JP20.RX SJ25.1 SJ29.1
RXI3: JP29.RX SJ35.1 SJ39.1
SIM_CLK: C3.1 JP4.C3 U3.12
SIM_CLK1: C18.1 JP10.C3 U4.12
SIM_CLK2: C29.1 JP19.C3 U7.12
SIM_CLK3: C40.1 JP28.C3 U10.12
SIM_DATA: C7.1 JP4.C7 R6.1 U3.13
SIM_DATA1: C20.1 JP10.C7 R14.1 U4.13
SIM_DATA2: C31.1 JP19.C7 R25.1 U7.13
SIM_DATA3: C42.1 JP28.C7 R36.1 U10.13
SIM_RST: C2.1 JP4.C2 U3.11
SIM_RST1: C19.1 JP10.C2 U4.11
SIM_RST2: C30.1 JP19.C2 U7.11
SIM_RST3: C41.1 JP28.C2 U10.11
TX2-2.8V: JP7.2 U3.44
TX2-2.8V1: JP17.2 U4.44
TX2-2.8V2: JP26.2 U7.44
TX2-2.8V3: JP35.2 U10.44
TX-2.8V: U2.5 U3.30
TX-2.8V1: U4.30 U6.5
TX-2.8V2: U7.30 U9.5
TX-2.8V3: U10.30 U12.5
TX-HV: JP8.RXI SJ7.2 U2.10
TX-HV1: JP15.RXI SJ15.2 U6.10
TX-HV2: JP24.RXI SJ25.2 U9.10
TX-HV3: JP33.RXI SJ35.2 U12.10
TX-SOFT: JP3.D2 SJ7.3
TX-SOFT1: JP11.D2 SJ15.3
TX-SOFT2: JP20.D2 SJ25.3
TX-SOFT3: JP29.D2 SJ35.3
TXO: JP3.TX SJ6.1 SJ10.1
TXO1: JP11.TX SJ14.1 SJ20.1
TXO2: JP20.TX SJ24.1 SJ30.1
TXO3: JP29.TX SJ34.1 SJ40.1
USB+: R11.2 U3.46
USB+1: R22.2 U4.46
USB+2: R33.2 U7.46
USB+3: R44.2 U10.46
USB-: R10.2 U3.45
USB-1: R21.2 U4.45
USB-2: R32.2 U7.45
USB-3: R43.2 U10.45
V_GPS: SJ4.2 U3.18
V_GPS1: SJ11.2 U4.18
V_GPS2: SJ21.2 U7.18
V_GPS3: SJ31.2 U10.18
VCCB: C11.1 SJ5.2 SJ8.2 U2.14
VCCB1: C22.1 SJ16.2 SJ17.2 U6.14
VCCB2: C33.1 SJ26.2 SJ27.2 U9.14
VCCB3: C44.1 SJ36.2 SJ37.2 U12.14
VCHG: U3.25
VCHG1: U4.25
VCHG2: U7.25
VCHG3: U10.25
VDDIO: C10.1 JP6.3 U2.1 U2.8 U3.41
VDDIO1: C21.1 JP18.3 U4.41 U6.1 U6.8
VDDIO2: C32.1 JP27.3 U7.41 U9.1 U9.8
VDDIO3: C43.1 JP36.3 U10.41 U12.1 U12.8
VRAW: C1.2 JP3.VIN R1.1 U1.2
VRAW1: C14.2 JP11.VIN R16.1 U5.2
VRAW2: C25.2 JP20.VIN R27.1 U8.2
VRAW3: C36.2 JP29.VIN R38.1 U11.2
VSIM: C4.1 C5.1 JP4.C1 JP4.C6 R6.2 U3.14
VSIM1: C16.1 C17.1 JP10.C1 JP10.C6 R14.2 U4.14
VSIM2: C27.1 C28.1 JP19.C1 JP19.C6 R25.2 U7.14
VSIM3: C38.1 C39.1 JP28.C1 JP28.C6 R36.2 U10.14